# EAGLE board CT_schematic (EAGLE 7.6.0)

Size 100 x 80 mm. Coordinates in mm from the lower left corner, seen from the top.
Outline: 0,0 100,0 100,80 0,80 0,0
Copper layers (1*16): Top 0.035mm / dielectric 1.5mm / Bottom 0.035mm
Design rules "default": minimum track width 10mil, minimum drill 24mil, track to track 8mil, track to pad 8mil, pad to pad 8mil, via to via 8mil, smd to smd 8mil, copper to edge 40mil, drill to drill 8mil, minimum pad ring 10mil, minimum via ring 8mil, stop-mask expansion 4mil, vias tented up to drill 0mil, thermal gap 10mil

## Footprints (pad centres in the part's own frame; a part is rotated, then mirrored left to right if it is on the bottom)
C0603 = smd 0.8 x 0.8: 1 -0.762,0; 2 0.762,0
C0402 = smd 0.5 x 0.5: 1 -0.508,0; 2 0.508,0
EXV-9B = smd 2.718 x 1.778: 1 -2.108,0; 2 2.108,0
EXV-9H = smd 3.505 x 1.676: 1 -2.857,0; 2 2.857,0
PJ-037B_PACKAGE = drill 3.7 square: 1 12,0 | drill 3.2 square: 2 6,0
R0603 = smd 0.8 x 0.8: 1 -0.762,0; 2 0.762,0
LQFP100 = smd 0.3 x 1.2: 1 -6,-7.75; 2 -5.5,-7.75; 3 -5,-7.75; 4 -4.5,-7.75; 5 -4,-7.75; 6 -3.5,-7.75; 7 -3,-7.75; 8 -2.5,-7.75; 9 -2,-7.75; 10 -1.5,-7.75; 11 -1,-7.75; 12 -0.5,-7.75; 13 0,-7.75; 14 0.5,-7.75; 15 1,-7.75; 16 1.5,-7.75; 17 2,-7.75; 18 2.5,-7.75; 19 3,-7.75; 20 3.5,-7.75; 21 4,-7.75; 22 4.5,-7.75; 23 5,-7.75; 24 5.5,-7.75; 25 6,-7.75; 51 6,7.75; 52 5.5,7.75; 53 5,7.75; 54 4.5,7.75; 55 4,7.75; 56 3.5,7.75; 57 3,7.75; 58 2.5,7.75; 59 2,7.75; 60 1.5,7.75; 61 1,7.75; 62 0.5,7.75; 63 0,7.75; 64 -0.5,7.75; 65 -1,7.75; 66 -1.5,7.75; 67 -2,7.75; 68 -2.5,7.75; 69 -3,7.75; 70 -3.5,7.75; 71 -4,7.75; 72 -4.5,7.75; 73 -5,7.75; 74 -5.5,7.75; 75 -6,7.75 | smd 1.2 x 0.3: 26 7.75,-6; 27 7.75,-5.5; 28 7.75,-5; 29 7.75,-4.5; 30 7.75,-4; 31 7.75,-3.5; 32 7.75,-3; 33 7.75,-2.5; 34 7.75,-2; 35 7.75,-1.5; 36 7.75,-1; 37 7.75,-0.5; 38 7.75,0; 39 7.75,0.5; 40 7.75,1; 41 7.75,1.5; 42 7.75,2; 43 7.75,2.5; 44 7.75,3; 45 7.75,3.5; 46 7.75,4; 47 7.75,4.5; 48 7.75,5; 49 7.75,5.5; 50 7.75,6; 76 -7.75,6; 77 -7.75,5.5; 78 -7.75,5; 79 -7.75,4.5; 80 -7.75,4; 81 -7.75,3.5; 82 -7.75,3; 83 -7.75,2.5; 84 -7.75,2; 85 -7.75,1.5; 86 -7.75,1; 87 -7.75,0.5; 88 -7.75,0; 89 -7.75,-0.5; 90 -7.75,-1; 91 -7.75,-1.5; 92 -7.75,-2; 93 -7.75,-2.5; 94 -7.75,-3; 95 -7.75,-3.5; 96 -7.75,-4; 97 -7.75,-4.5; 98 -7.75,-5; 99 -7.75,-5.5; 100 -7.75,-6
SOIC-8 = smd 1.6 x 0.6: 1 -2.7,1.905 | smd 1.55 x 0.6: 2 -2.7,0.635; 3 -2.7,-0.635; 4 -2.7,-1.905; 5 2.7,-1.905; 6 2.7,-0.635; 7 2.7,0.635; 8 2.7,1.905
TFBGA-153 = smd 0.3 x 0.3: A1 -3.25,3.25; A2 -2.75,3.25; A3 -2.25,3.25; A4 -1.75,3.25; A5 -1.25,3.25; A6 -0.75,3.25; A7 -0.25,3.25; A8 0.25,3.25; A9 0.75,3.25; A10 1.25,3.25; A11 1.75,3.25; A12 2.25,3.25; A13 2.75,3.25; A14 3.25,3.25; B1 -3.25,2.75; B2 -2.75,2.75; B3 -2.25,2.75; B4 -1.75,2.75; B5 -1.25,2.75; B6 -0.75,2.75; B7 -0.25,2.75; B8 0.25,2.75; B9 0.75,2.75; B10 1.25,2.75; B11 1.75,2.75; B12 2.25,2.75; B13 2.75,2.75; B14 3.25,2.75; C1 -3.25,2.25; C2 -2.75,2.25; C3 -2.25,2.25; C4 -1.75,2.25; C5 -1.25,2.25; C6 -0.75,2.25; C7 -0.25,2.25; C8 0.25,2.25; C9 0.75,2.25; C10 1.25,2.25; C11 1.75,2.25; C12 2.25,2.25; C13 2.75,2.25; C14 3.25,2.25; D1 -3.25,1.75; D2 -2.75,1.75; D3 -2.25,1.75; D4 -1.75,1.75; D12 2.25,1.75; D13 2.75,1.75; D14 3.25,1.75; E1 -3.25,1.25; E2 -2.75,1.25; E3 -2.25,1.25; E5 -1.25,1.25; E6 -0.75,1.25; E7 -0.25,1.25; E8 0.25,1.25; E9 0.75,1.25; E10 1.25,1.25; E12 2.25,1.25; E13 2.75,1.25; E14 3.25,1.25; F1 -3.25,0.75; F2 -2.75,0.75; F3 -2.25,0.75; F5 -1.25,0.75; F10 1.25,0.75; F12 2.25,0.75; F13 2.75,0.75; F14 3.25,0.75; G1 -3.25,0.25; G2 -2.75,0.25; G3 -2.25,0.25; G5 -1.25,0.25; G10 1.25,0.25; G12 2.25,0.25; G13 2.75,0.25; G14 3.25,0.25; H1 -3.25,-0.25; H2 -2.75,-0.25; H3 -2.25,-0.25; H5 -1.25,-0.25; H10 1.25,-0.25; H12 2.25,-0.25; H13 2.75,-0.25; H14 3.25,-0.25; J1 -3.25,-0.75; J2 -2.75,-0.75; J3 -2.25,-0.75; J5 -1.25,-0.75; J10 1.25,-0.75; J12 2.25,-0.75; J13 2.75,-0.75; J14 3.25,-0.75; K1 -3.25,-1.25; K2 -2.75,-1.25; K3 -2.25,-1.25; K5 -1.25,-1.25; K6 -0.75,-1.25; K7 -0.25,-1.25; K8 0.25,-1.25; K9 0.75,-1.25; K10 1.25,-1.25; K12 2.25,-1.25; K13 2.75,-1.25; K14 3.25,-1.25; L1 -3.25,-1.75; L2 -2.75,-1.75; L3 -2.25,-1.75; L12 2.25,-1.75; L13 2.75,-1.75; L14 3.25,-1.75; M1 -3.25,-2.25; M2 -2.75,-2.25; M3 -2.25,-2.25; M4 -1.75,-2.25; M5 -1.25,-2.25; M6 -0.75,-2.25; M7 -0.25,-2.25; M8 0.25,-2.25; M9 0.75,-2.25; M10 1.25,-2.25; M11 1.75,-2.25; M12 2.25,-2.25; M13 2.75,-2.25; M14 3.25,-2.25; N1 -3.25,-2.75; N2 -2.75,-2.75; N3 -2.25,-2.75; N4 -1.75,-2.75; N5 -1.25,-2.75; N6 -0.75,-2.75; N7 -0.25,-2.75; N8 0.25,-2.75; N9 0.75,-2.75; N10 1.25,-2.75; N11 1.75,-2.75; N12 2.25,-2.75; N13 2.75,-2.75; N14 3.25,-2.75; P1 -3.25,-3.25; P2 -2.75,-3.25; P3 -2.25,-3.25; P4 -1.75,-3.25; P5 -1.25,-3.25; P6 -0.75,-3.25; P7 -0.25,-3.25; P8 0.25,-3.25; P9 0.75,-3.25; P10 1.25,-3.25; P11 1.75,-3.25; P12 2.25,-3.25; P13 2.75,-3.25; P14 3.25,-3.25
ABS07-32.768KHZ-7-T = smd 1.1 x 2.4: 1 -2.5,0; 2 0,0
ASFL1 = smd 1.7 x 1.5: 1 -1.27,-1.1; 2 1.27,-1.1; 3 1.27,1.1; 4 -1.27,1.1
LP2954 = smd 1.6 x 0.6: 1 -2.475,1.905 | smd 1.55 x 0.6: 2 -2.475,0.635; 3 -2.475,-0.635; 4 -2.475,-1.905; 5 2.475,-1.905; 6 2.475,-0.635; 7 2.475,0.635; 8 2.475,1.905
SON-6 = smd 0.55 x 0.3: 1 -0.355,0.5 | smd 0.52 x 0.3: 2 -0.37,0; 3 -0.37,-0.5; 4 0.37,-0.5; 5 0.37,0; 6 0.37,0.5
SW_4-1437565-2 = smd 1.4 x 2.1: 1 -2.23,4.55; 2 -2.23,-4.55; 3 2.23,4.55; 4 2.23,-4.55
LGM67K-G1J2-24-Z = smd 0.8 x 1.4: A -2,0; C 0,0
NC7SZ125M5X = smd 1.3 x 0.7: 1 -1.3,0.95; 2 -1.3,0; 3 -1.3,-0.95; 4 1.3,-0.95; 5 1.3,0.95

## Placement (x,y rotation side)
C1  1e-07  [C0603]  -34.29,60.96 0 top  (outside the outline)
C2  1e-07  [C0603]  -38.1,60.96 0 top  (outside the outline)
C3  1e-07  [C0603]  -41.91,60.96 0 top  (outside the outline)
C4  1e-07  [C0603]  -45.72,60.96 0 top  (outside the outline)
C5  1e-07  [C0603]  -49.53,60.96 0 top  (outside the outline)
C6  4.7e-06  [C0603]  -19.05,60.96 0 top  (outside the outline)
C7  1e-07  [C0603]  -53.34,60.96 0 top  (outside the outline)
C8  1e-08  [C0603]  -57.15,60.96 0 top  (outside the outline)
C9  1e-06  [C0603]  -60.96,60.96 0 top  (outside the outline)
C10  1e-11  [C0402]  -34.29,66.04 0 top  (outside the outline)
C11  1e-11  [C0402]  -38.1,66.04 0 top  (outside the outline)
C12  1e-08  [C0402]  -41.91,66.04 0 top  (outside the outline)
C13  1e-07  [C0402]  -45.72,66.04 0 top  (outside the outline)
C14  2.2e-06  [C0603]  -22.86,60.96 0 top  (outside the outline)
C15  2.2e-06  [C0603]  -26.67,60.96 0 top  (outside the outline)
C16  1e-07  [C0402]  -49.53,66.04 0 top  (outside the outline)
C17  1e-07  [C0402]  -53.34,66.04 0 top  (outside the outline)
C18  2.2e-06  [C0603]  -30.48,60.96 0 top  (outside the outline)
C19  1e-08  [C0402]  -57.15,66.04 0 top  (outside the outline)
C20  1e-06  [EXV-9B]  -49.53,41.91 0 top  (outside the outline)
C21  2.2e-06  [EXV-9B]  -58.42,41.91 0 top  (outside the outline)
C22  1e-07  [C0402]  -60.96,66.04 0 top  (outside the outline)
C23  0.0001  [EXV-9H]  -35.56,34.29 0 top  (outside the outline)
C24  0.0001  [EXV-9H]  -46.99,34.29 0 top  (outside the outline)
C25  1e-08  [C0402]  -64.77,66.04 0 top  (outside the outline)
C26  1e-08  [C0402]  -15.24,71.12 0 top  (outside the outline)
J1  PJ-037B  [PJ-037B_PACKAGE]  -62.23,7.62 0 top  (outside the outline)
R2  1000.0  [R0603]  -64.77,60.96 0 top  (outside the outline)
R4  4700.0  [R0603]  -15.24,66.04 0 top  (outside the outline)
R5  4700.0  [R0603]  -19.05,66.04 0 top  (outside the outline)
R6  2200.0  [R0603]  -22.86,66.04 0 top  (outside the outline)
R7  2200.0  [R0603]  -26.67,66.04 0 top  (outside the outline)
R8  10000.0  [R0603]  -59.69,49.53 0 top  (outside the outline)
R9  10000.0  [R0603]  -64.77,49.53 0 top  (outside the outline)
R10  34000.0  [R0603]  -15.24,55.88 0 top  (outside the outline)
R11  34000.0  [R0603]  -20.32,55.88 0 top  (outside the outline)
R12  34000.0  [R0603]  -25.4,55.88 0 top  (outside the outline)
R13  34000.0  [R0603]  -30.48,55.88 0 top  (outside the outline)
R14  34000.0  [R0603]  -35.56,55.88 0 top  (outside the outline)
R15  34000.0  [R0603]  -40.64,55.88 0 top  (outside the outline)
R16  34000.0  [R0603]  -45.72,55.88 0 top  (outside the outline)
R17  34000.0  [R0603]  -50.8,55.88 0 top  (outside the outline)
R18  34000.0  [R0603]  -55.88,55.88 0 top  (outside the outline)
R19  34000.0  [R0603]  -60.96,55.88 0 top  (outside the outline)
R20  100000.0  [R0603]  -34.29,49.53 0 top  (outside the outline)
R21  100000.0  [R0603]  -39.37,49.53 0 top  (outside the outline)
R22  164658.62  [R0603]  -29.21,49.53 0 top  (outside the outline)
R23  100000.0  [R0603]  -44.45,49.53 0 top  (outside the outline)
R24  10000.0  [R0603]  -66.04,55.88 0 top  (outside the outline)
R25  10000.0  [R0603]  -15.24,60.96 0 top  (outside the outline)
R26  9100.0  [R0603]  -30.48,66.04 0 top  (outside the outline)
R27  680000.0  [R0603]  -49.53,49.53 0 top  (outside the outline)
R28  120000.0  [R0603]  -54.61,49.53 0 top  (outside the outline)
U1  STM32L162VDT6  [LQFP100]  -38.1,8.89 0 top  (outside the outline)
U2  M24M02-DRMN6TP  [SOIC-8]  -44.45,22.86 0 top  (outside the outline)
U3  mtfc4gmcdm  [TFBGA-153]  -20.32,8.89 0 top  (outside the outline)
U4  ABS07-32.768KHZ-7-T  [ABS07-32.768KHZ-7-T]  -27.94,43.18 0 top  (outside the outline)
U5  ASFL1-25MHZ-NCS  [ASFL1]  -26.67,34.29 0 top  (outside the outline)
U6  LP2954AIMX/NOPB  [LP2954]  -60.96,22.86 0 top  (outside the outline)
U7  TPS3895ADRYR  [SON-6]  -17.78,69.85 0 top  (outside the outline)
U8  4-1437565-2  [SW_4-1437565-2]  -27.94,24.13 0 top  (outside the outline)
U9  Q65110A2395  [LGM67K-G1J2-24-Z]  -36.83,41.91 0 top  (outside the outline)
U10  nc7sz125m5x  [NC7SZ125M5X]  -15.24,49.53 0 top  (outside the outline)
U11  nc7sz125m5x  [NC7SZ125M5X]  -21.59,49.53 0 top  (outside the outline)

## Library data of the parts
C1-C26 J1 R2 R4-R28 U1-U11 = circuit_tree

## Nets
CLK_CRYSTAL_U1_8: C10.1 U1.8 U4.1
CLK_CRYSTAL_U1_9: C11.1 U1.9 U4.2
CLK_U1_12: U1.12 U5.3
GND: C1.2 C2.2 C3.2 C4.2 C5.2 C6.2 C7.2 C8.2 C9.2 C10.2 C11.2 C12.2 C13.2 C14.2 C15.2 C16.2 C17.2 C18.2 C19.2 C20.2 C21.2 C22.2 C23.2 C24.2 C25.2 C26.2 J1.2 R2.2 R8.2 R9.2 R23.2 R26.2 R28.2 U1.10 U1.19 U1.20 U1.27 U1.49 U1.74 U1.99 U2.4 U3.C4 U3.E7 U3.G5 U3.H10 U3.K8 U3.N2 U3.N5 U3.P4 U3.P6 U5.2 U6.4 U7.2 U9.C U10.1 U10.3 U11.1 U11.3
NET_U1_6: C7.1 U1.6
NET_U1_14: R5.1 U1.14 U11.4
NET_U1_92: R6.1 U1.92 U2.6
NET_U1_93: R7.1 U1.93 U2.5
NET_U1_94: R8.1 U1.94
NET_U1_97: U9.A
NET_U1_98: U8.3 U8.4
NET_U2_3: R9.1 U2.3
NET_U3_C2: C15.1 C16.1 U3.C2
NET_U3_K5: R4.1 U3.K5 U10.4
NET_U6_3: R21.1 U6.3
NET_U6_5: R20.1 U6.5
NET_U6_7: R22.2 R23.1 U6.7
NET_U7_1: R25.1 R26.1 U7.1
NET_U7_3: R27.2 R28.1 U7.3
NET_U7_4: R24.1 U7.4 U10.2 U11.2
NET_U8_1: R2.1 U8.1 U8.2
PROC_SDIO_CK: R19.1 U1.80 U3.M6
PROC_SDIO_CMD: R18.1 U1.83 U3.M5
PROC_SDIO_D0: R10.1 U1.65 U3.A3
PROC_SDIO_D1: R11.1 U1.66 U3.A4
PROC_SDIO_D2: R12.1 U1.78 U3.A5
PROC_SDIO_D3: R13.1 U1.79 U3.B2
PROC_SDIO_D4: R14.1 U1.95 U3.B3
PROC_SDIO_D5: R15.1 U1.96 U3.B4
PROC_SDIO_D6: R16.1 U1.63 U3.B5
PROC_SDIO_D7: R17.1 U1.64 U3.B6
VCC_S1_7V2: C20.1 C23.1 C24.1 J1.1 R21.2 U6.8
VCC_TIER1_3V3: C1.1 C2.1 C3.1 C4.1 C5.1 C6.1 C8.1 C9.1 C12.1 C13.1 C14.1 C17.1 C18.1 C19.1 C21.1 C22.1 C25.1 C26.1 R4.2 R5.2 R6.2 R7.2 R10.2 R11.2 R12.2 R13.2 R14.2 R15.2 R16.2 R17.2 R18.2 R19.2 R20.2 R22.1 R24.2 R25.2 R27.1 U1.11 U1.21 U1.22 U1.28 U1.50 U1.75 U1.100 U2.8 U3.C6 U3.E6 U3.F5 U3.J10 U3.K9 U3.M4 U3.N4 U3.P3 U3.P5 U5.4 U6.1 U7.6 U10.5 U11.5

## Tracks (layer width: path | path; a pad name or v marks a point on that pad's centre or on a via)
CLK_CRYSTAL_U1_8  (2 unrouted)
CLK_CRYSTAL_U1_9  (2 unrouted)
CLK_U1_12  (1 unrouted)
GND  (57 unrouted)
NET_U1_6  (1 unrouted)
NET_U1_14  (2 unrouted)
NET_U1_92  (2 unrouted)
NET_U1_93  (2 unrouted)
NET_U1_94  (1 unrouted)
NET_U1_98  (1 unrouted)
NET_U2_3  (1 unrouted)
NET_U3_C2  (2 unrouted)
NET_U3_K5  (2 unrouted)
NET_U6_3  (1 unrouted)
NET_U6_5  (1 unrouted)
NET_U6_7  (2 unrouted)
NET_U7_1  (2 unrouted)
NET_U7_3  (2 unrouted)
NET_U7_4  (3 unrouted)
NET_U8_1  (2 unrouted)
PROC_SDIO_CK  (2 unrouted)
PROC_SDIO_CMD  (2 unrouted)
PROC_SDIO_D0  (2 unrouted)
PROC_SDIO_D1  (2 unrouted)
PROC_SDIO_D2  (2 unrouted)
PROC_SDIO_D3  (2 unrouted)
PROC_SDIO_D4  (2 unrouted)
PROC_SDIO_D5  (2 unrouted)
PROC_SDIO_D6  (2 unrouted)
PROC_SDIO_D7  (2 unrouted)
VCC_S1_7V2  (5 unrouted)
VCC_TIER1_3V3  (58 unrouted)